# EAGLE board msx_rom (EAGLE 7.6.0)
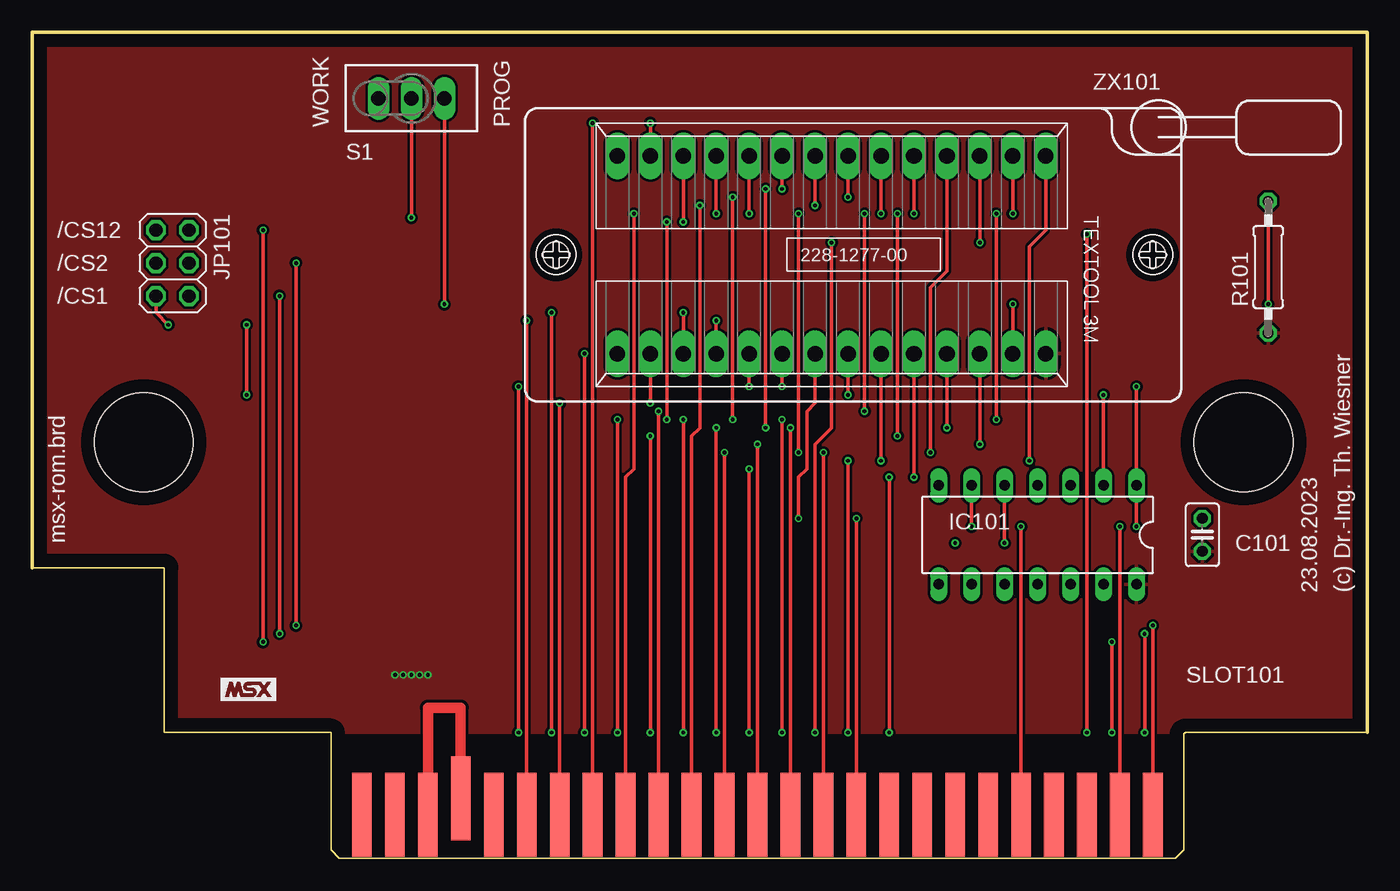
[diagram p0: board, top side]
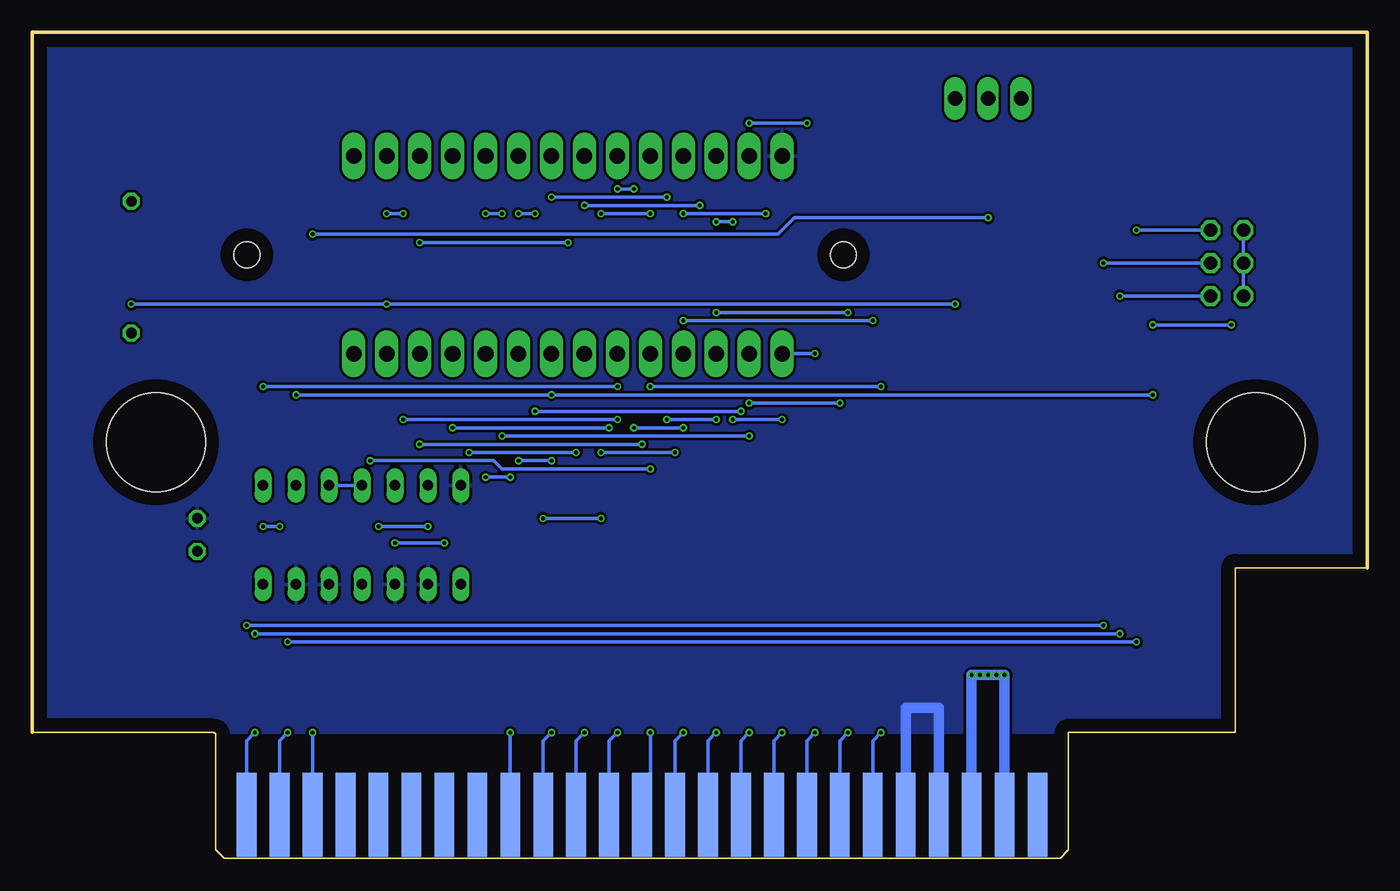
[diagram p1: board, bottom side, seen from below]

Size 102.87 x 63.66 mm. Coordinates in mm from the lower left corner, seen from the top.
Outline: 0,22.38 0,63.66 102.87,63.66 102.87,9.68
Copper layers (1*16): Top 0.035mm / dielectric 1.5mm / Bottom 0.035mm
Design rules "default *": minimum track width 10mil, minimum drill 0.3mm, track to track 8mil, track to pad 8mil, pad to pad 8mil, via to via 8mil, smd to smd 8mil, copper to edge 40mil, drill to drill 8mil, minimum pad ring 10mil, minimum via ring 0.125mm, stop-mask expansion 4mil, vias tented up to drill 0mil, thermal gap 10mil

## Footprints (pad centres in the part's own frame; a part is rotated, then mirrored left to right if it is on the bottom)
C025-025X050 = drill 0.813 octagon: 1 -1.27,0; 2 1.27,0
DIL14 = drill 0.813 long: 1 -7.62,-3.81; 2 -5.08,-3.81; 3 -2.54,-3.81; 4 0,-3.81; 5 2.54,-3.81; 6 5.08,-3.81; 7 7.62,-3.81; 8 7.62,3.81; 9 5.08,3.81; 10 2.54,3.81; 11 0,3.81; 12 -2.54,3.81; 13 -5.08,3.81; 14 -7.62,3.81
2X03 = drill 1.016 octagon: 1 -2.54,-1.27; 2 -2.54,1.27; 3 0,-1.27; 4 0,1.27; 5 2.54,-1.27; 6 2.54,1.27
0207/10 = drill 0.813 octagon: 1 -5.08,0; 2 5.08,0
TL3XPO = drill 1.1 pad 1.422 long: 1 -2.54,0; 2 0,0; 3 2.54,0
MSXCARD = smd 1.524 x 6.477 bottom: A1 -25.4,2.54; A2 -27.94,2.54; A3 -30.48,2.54; A4 -33.02,2.54; A5 -35.56,2.54; A6 -38.1,2.54; A7 -40.64,2.54; A8 -43.18,2.54; A9 -45.72,2.54; A10 -48.26,2.54; A11 -50.8,2.54; A12 -53.34,2.54; A13 -55.88,2.54; A14 -58.42,2.54; A15 -60.96,2.54; A16 -63.5,2.54; A17 -66.04,2.54; A18 -68.58,2.54; A19 -71.12,2.54; A20 -73.66,2.54; A21 -76.2,2.54; A22 -78.74,2.54; A23 -81.28,2.54; A24 -83.82,2.54; A25 -86.36,2.54 | smd 1.524 x 6.477: B1 -25.4,2.54; B2 -27.94,2.54; B3 -30.48,2.54; B4 -33.02,2.54; B5 -35.56,2.54; B6 -38.1,2.54; B7 -40.64,2.54; B8 -43.18,2.54; B9 -45.72,2.54; B10 -48.26,2.54; B11 -50.8,2.54; B12 -53.34,2.54; B13 -55.88,2.54; B14 -58.42,2.54; B15 -60.96,2.54; B16 -63.5,2.54; B17 -66.04,2.54; B18 -68.58,2.54; B19 -71.12,2.54; B20 -73.66,2.54; B21 -76.2,2.54; B22 -78.74,3.81; B23 -81.28,2.54; B24 -83.82,2.54; B25 -86.36,2.54 | hole 7.62: -103.188,31.274; -18.415,31.274
228-1277-00-0602J = drill 1.2 long: 1 -16.51,-7.62; 2 -13.97,-7.62; 3 -11.43,-7.62; 4 -8.89,-7.62; 5 -6.35,-7.62; 6 -3.81,-7.62; 7 -1.27,-7.62; 8 1.27,-7.62; 9 3.81,-7.62; 10 6.35,-7.62; 11 8.89,-7.62; 12 11.43,-7.62; 13 13.97,-7.62; 14 16.51,-7.62; 15 16.51,7.62; 16 13.97,7.62; 17 11.43,7.62; 18 8.89,7.62; 19 6.35,7.62; 20 3.81,7.62; 21 1.27,7.62; 22 -1.27,7.62; 23 -3.81,7.62; 24 -6.35,7.62; 25 -8.89,7.62; 26 -11.43,7.62; 27 -13.97,7.62; 28 -16.51,7.62 | hole 2: 21.24,0; -24.74,0

## Placement (x,y rotation side)
C101  100n  [C025-025X050]  90.17,24.92 270 top
IC101  74HCT32N  [DIL14]  77.47,24.92 180 top
JP101  [2X03]  10.79,45.88 270 top
R101  10k  [0207/10]  95.25,45.56 90 top
S1  PROG  [TL3XPO]  29.21,58.58 0 top
SLOT101  MSXSLOT-CARD  [MSXCARD]  111.76,0.79 0 top
ZX101  228-1277-00-0602J  [228-1277-00-0602J]  61.59,46.51 180 top

## Library data of the parts
C101 R101 = rcl
IC101 = 74xx-eu
JP101 = pinhead
S1 = switch
SLOT101 = mbc
ZX101 = con-3m; MF: 3M; MPN: 228-1277-00-0602J; OC_FARNELL: 9897356; OC_NEWARK: 85K7825

## Nets
+5V: C101.2 IC101.14 R101.1 SLOT101.A23 SLOT101.A24 ZX101.28
/BUSDIR: IC101.6 SLOT101.B5
/CS1: JP101.6 SLOT101.A1
/CS2: JP101.4 SLOT101.B1
/CS12: JP101.2 SLOT101.A2
/OE: IC101.2 JP101.1 JP101.3 JP101.5 ZX101.22
/RD: IC101.5
/SLTSL: IC101.1 SLOT101.B2 ZX101.20
/WE: R101.2 S1.3 ZX101.27
/WEX: S1.2 SLOT101.A3
A0: SLOT101.B14 ZX101.10
A1: SLOT101.A14 ZX101.9
A2: SLOT101.B15 ZX101.8
A3: SLOT101.A15 ZX101.7
A4: SLOT101.B16 ZX101.6
A5: SLOT101.A16 ZX101.5
A6: SLOT101.B11 ZX101.4
A7: SLOT101.A11 ZX101.3
A8: SLOT101.B12 ZX101.25
A9: SLOT101.A9 ZX101.24
A10: SLOT101.B10 ZX101.21
A11: SLOT101.A10 ZX101.23
A12: SLOT101.A12 ZX101.2
A13: SLOT101.B13 ZX101.26
A14: SLOT101.A13 ZX101.1
D0: SLOT101.B17 ZX101.11
D1: SLOT101.A17 ZX101.12
D2: SLOT101.B18 ZX101.13
D3: SLOT101.A18 ZX101.15
D4: SLOT101.B19 ZX101.16
D5: SLOT101.A19 ZX101.17
D6: SLOT101.B20 ZX101.18
D7: SLOT101.A20 ZX101.19
GND: C101.1 IC101.7 IC101.9 IC101.10 IC101.12 IC101.13 SLOT101.A21 SLOT101.A22 ZX101.14
N$3: IC101.3 IC101.4
N$28: SLOT101.B22 SLOT101.B23

## Tracks (layer width: path | path; a pad name or v marks a point on that pad's centre or on a via)
+5V  (via drill 0.3)
  Bottom 0.813: SLOT101.A24 v27.94,14.13 v28.57,14.13 v29.21,14.13 v29.84,14.13 v30.48,14.13 SLOT101.A23
  pour Top: 0,63.66 102.87,63.66 102.87,9.68 10.16,9.68 10.16,22.38 0,22.38
/BUSDIR  (via drill 0.3)
  Top 0.254: SLOT101.B5 v76.2,25.56 | v72.39,25.56 IC101.6
  Bottom 0.254: v76.2,25.56 v72.39,25.56
/CS1  (via drill 0.3)
  Top 0.254: v85.72,9.68 v85.72,17.3 | v19.05,17.3 v19.05,43.34
  Bottom 0.254: SLOT101.A1 86.36,9.05 v85.72,9.68 | v85.72,17.3 v19.05,17.3 | v19.05,43.34 JP101.6
/CS2  (via drill 0.3)
  Top 0.254: SLOT101.B1 v86.36,17.94 | v20.32,17.94 v20.32,45.88
  Bottom 0.254: v86.36,17.94 v20.32,17.94 | v20.32,45.88 JP101.4
/CS12  (via drill 0.3)
  Top 0.254: v83.19,9.68 v83.19,16.67 | v17.78,16.67 v17.78,48.42
  Bottom 0.254: SLOT101.A2 83.82,9.05 v83.19,9.68 | v83.19,16.67 v17.78,16.67 | v17.78,48.42 JP101.2
/OE  (via drill 0.3)
  Top 0.254: IC101.2 v82.55,35.72 | v62.87,35.72 ZX101.22 | JP101.5 9.53,42.07 v10.48,41.12 | v16.51,41.12 v16.51,35.72
  Bottom 0.254: v82.55,35.72 v62.87,35.72 v16.51,35.72 | JP101.1 JP101.3 JP101.5 | v10.48,41.12 v16.51,41.12
/RD  (via drill 0.3)
  Top 0.254: v74.93,24.29 IC101.5
  Bottom 0.254: v71.12,24.29 v74.93,24.29
/SLTSL  (via drill 0.3)
  Top 0.254: SLOT101.B2 v83.82,25.56 | v85.09,25.56 IC101.1 v85.09,36.35 | v57.78,36.35 ZX101.20
  Bottom 0.254: v83.82,25.56 v85.09,25.56 | v85.09,36.35 v57.78,36.35
/WE  (via drill 0.3)
  Top 0.254: ZX101.27 v75.56,42.7 | v95.25,42.7 R101.2 | v31.75,42.7 S1.3
  Bottom 0.254: v95.25,42.7 v75.56,42.7 v31.75,42.7
/WEX  (via drill 0.3)
  Top 0.254: v81.28,9.68 v81.28,48.1 | v29.21,49.37 S1.2
  Bottom 0.254: SLOT101.A3 v81.28,9.68 | v81.28,48.1 45.4,48.1 44.13,49.37 v29.21,49.37
A0  (via drill 0.3)
  Top 0.254: SLOT101.B14 v53.34,31.27 | v59.05,31.27 v59.05,49.69 | v55.24,49.69 ZX101.10
  Bottom 0.254: v53.34,31.27 v59.05,31.27 | v59.05,49.69 v55.24,49.69
A1  (via drill 0.3)
  Top 0.254: v52.7,9.68 v52.7,33.18 | v56.52,33.18 v56.52,51.59 | v57.78,51.59 ZX101.9
  Bottom 0.254: SLOT101.A14 53.34,9.05 v52.7,9.68 | v52.7,33.18 v56.52,33.18 | v56.52,51.59 v57.78,51.59
A2  (via drill 0.3)
  Top 0.254: SLOT101.B15 50.8,32.54 51.44,33.18 v51.44,50.32 | v60.33,50.32 ZX101.8
  Bottom 0.254: v51.44,50.32 v60.33,50.32
A3  (via drill 0.3)
  Top 0.254: v50.16,9.68 v50.16,33.81 | v53.98,33.81 v53.98,50.96 | v62.87,50.96 ZX101.7
  Bottom 0.254: SLOT101.A15 50.8,9.05 v50.16,9.68 | v50.16,33.81 v53.98,33.81 | v53.98,50.96 v62.87,50.96
A4  (via drill 0.3)
  Top 0.254: SLOT101.B16 v48.26,34.45 | v64.14,34.45 v64.14,49.69 | v65.41,49.69 ZX101.6
  Bottom 0.254: v48.26,34.45 v64.14,34.45 | v64.14,49.69 v65.41,49.69
A5  (via drill 0.3)
  Top 0.254: v47.62,9.68 v47.62,32.54 | v66.67,32.54 v66.67,49.69 | v67.94,49.69 ZX101.5
  Bottom 0.254: SLOT101.A16 48.26,9.05 v47.62,9.68 | v47.62,32.54 v66.67,32.54 | v66.67,49.69 v67.94,49.69
A6  (via drill 0.3)
  Top 0.254: ZX101.4 70.48,45.24 69.22,43.97 v69.22,31.27 | v60.96,31.27 SLOT101.B11
  Bottom 0.254: v69.22,31.27 v60.96,31.27
A7  (via drill 0.3)
  Top 0.254: v60.33,9.68 60.33,31.91 61.59,33.18 v61.59,47.47 | v73.03,47.47 ZX101.3
  Bottom 0.254: SLOT101.A11 60.96,9.05 v60.33,9.68 | v61.59,47.47 v73.03,47.47
A8  (via drill 0.3)
  Top 0.254: SLOT101.B12 v58.42,33.18 | v70.48,33.18 ZX101.25
  Bottom 0.254: v58.42,33.18 v70.48,33.18
A9  (via drill 0.3)
  Top 0.254: v66.04,9.68 v66.04,29.37 | v67.94,29.37 ZX101.24
  Bottom 0.254: SLOT101.A9 v66.04,9.68 | v66.04,29.37 v67.94,29.37
A10  (via drill 0.3)
  Top 0.254: SLOT101.B10 v63.5,26.19 | v59.05,26.19 59.05,29.37 59.69,30 59.69,34.45 60.33,35.08 ZX101.21
  Bottom 0.254: v63.5,26.19 v59.05,26.19
A11  (via drill 0.3)
  Top 0.254: v62.87,9.68 v62.87,30.64 | v65.41,30.64 ZX101.23
  Bottom 0.254: SLOT101.A10 63.5,9.05 v62.87,9.68 | v62.87,30.64 v65.41,30.64
A12  (via drill 0.3)
  Top 0.254: v57.78,9.68 v57.78,33.81 | v74.3,33.81 v74.3,49.69 | v75.56,49.69 ZX101.2
  Bottom 0.254: SLOT101.A12 58.42,9.05 v57.78,9.68 | v57.78,33.81 v74.3,33.81 | v74.3,49.69 v75.56,49.69
A13  (via drill 0.3)
  Top 0.254: SLOT101.B13 v55.88,31.91 | v73.03,31.91 ZX101.26
  Bottom 0.254: v55.88,31.91 v73.03,31.91
A14  (via drill 0.3)
  Top 0.254: v55.24,9.68 v55.24,30 | v76.83,30.64 76.83,47.15 78.11,48.42 ZX101.1
  Bottom 0.254: SLOT101.A13 55.24,5.87 v55.24,9.68 | v55.24,30 66.67,30 67.31,30.64 v76.83,30.64
D0  (via drill 0.3)
  Top 0.254: SLOT101.B17 45.72,29.37 46.35,30 v46.35,49.69 | v52.7,49.69 ZX101.11
  Bottom 0.254: v46.35,49.69 v52.7,49.69
D1  (via drill 0.3)
  Top 0.254: v45.09,9.68 v45.09,33.81 | v48.9,33.81 v48.9,49.05 | v50.16,49.05 ZX101.12
  Bottom 0.254: SLOT101.A17 45.72,9.05 v45.09,9.68 | v45.09,33.81 v48.9,33.81 | v48.9,49.05 v50.16,49.05
D2  (via drill 0.3)
  Top 0.254: SLOT101.B18 v43.18,56.67 | v47.62,56.67 ZX101.13
  Bottom 0.254: v43.18,56.67 v47.62,56.67
D3  (via drill 0.3)
  Top 0.254: v42.55,9.68 v42.55,38.89
  Bottom 0.254: SLOT101.A18 43.18,9.05 v42.55,9.68 | v42.55,38.89 ZX101.15
D4  (via drill 0.3)
  Top 0.254: SLOT101.B19 v40.64,35.08 | v47.62,35.08 ZX101.16
  Bottom 0.254: v40.64,35.08 v47.62,35.08
D5  (via drill 0.3)
  Top 0.254: v40.01,9.68 v40.01,42.07 | v50.16,42.07 ZX101.17
  Bottom 0.254: SLOT101.A19 40.64,9.05 v40.01,9.68 | v40.01,42.07 v50.16,42.07
D6  (via drill 0.3)
  Top 0.254: SLOT101.B20 v38.1,41.43 | v52.7,41.43 ZX101.18
  Bottom 0.254: v38.1,41.43 v52.7,41.43
D7  (via drill 0.3)
  Top 0.254: v37.47,9.68 v37.47,36.35 | v55.24,36.35 ZX101.19
  Bottom 0.254: SLOT101.A20 38.1,9.05 v37.47,9.68 | v37.47,36.35 v55.24,36.35
GND
  Bottom 0.813: SLOT101.A22 33.02,11.59 35.56,11.59 SLOT101.A21
  pour Bottom: 0,63.66 102.87,63.66 102.87,9.68 10.16,9.68 10.16,22.38 0,22.38
N$3
  Bottom 0.254: IC101.4 IC101.3
N$28
  Top 0.813: SLOT101.B22 33.02,11.59 30.48,11.59 SLOT101.B23

## Text on the board
tNames: WORK | PROG | /CS12 | /CS2 | /CS1 | msx-rom.brd | 23.08.2023 | (c) Dr.-Ing. Th. Wiesner